# EAGLE board main-manufactured-2016-09-30 (EAGLE 7.6.0)
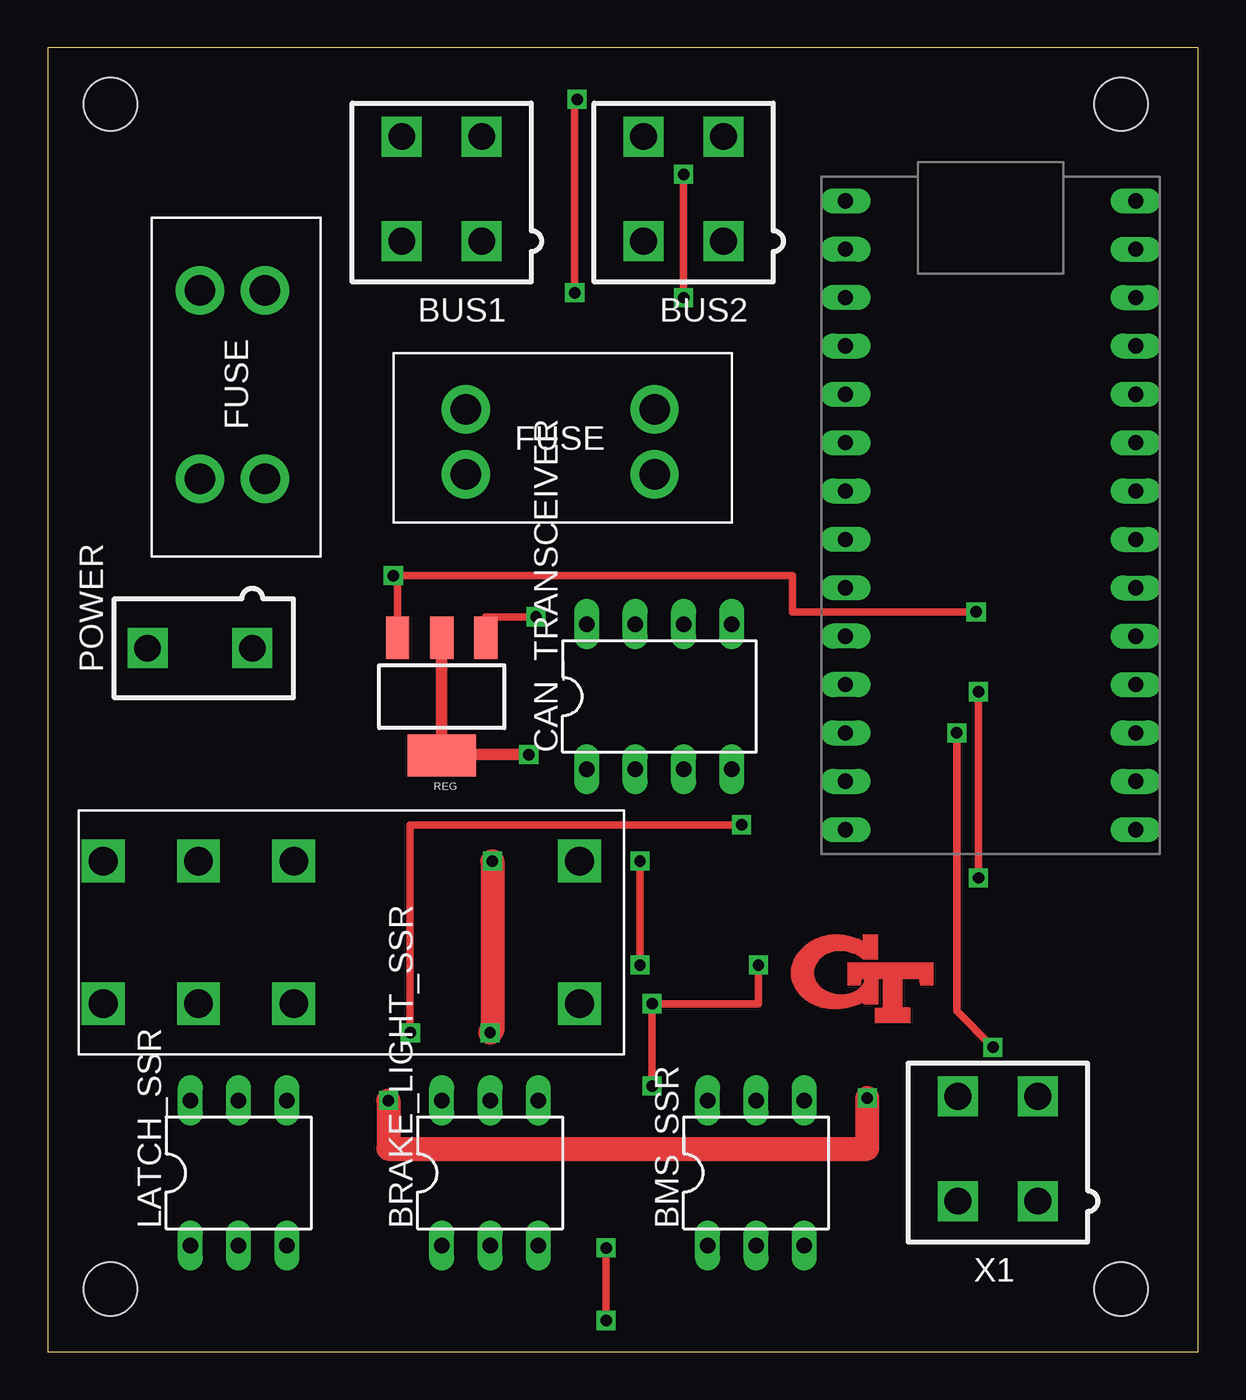
[diagram p0: board, top side]
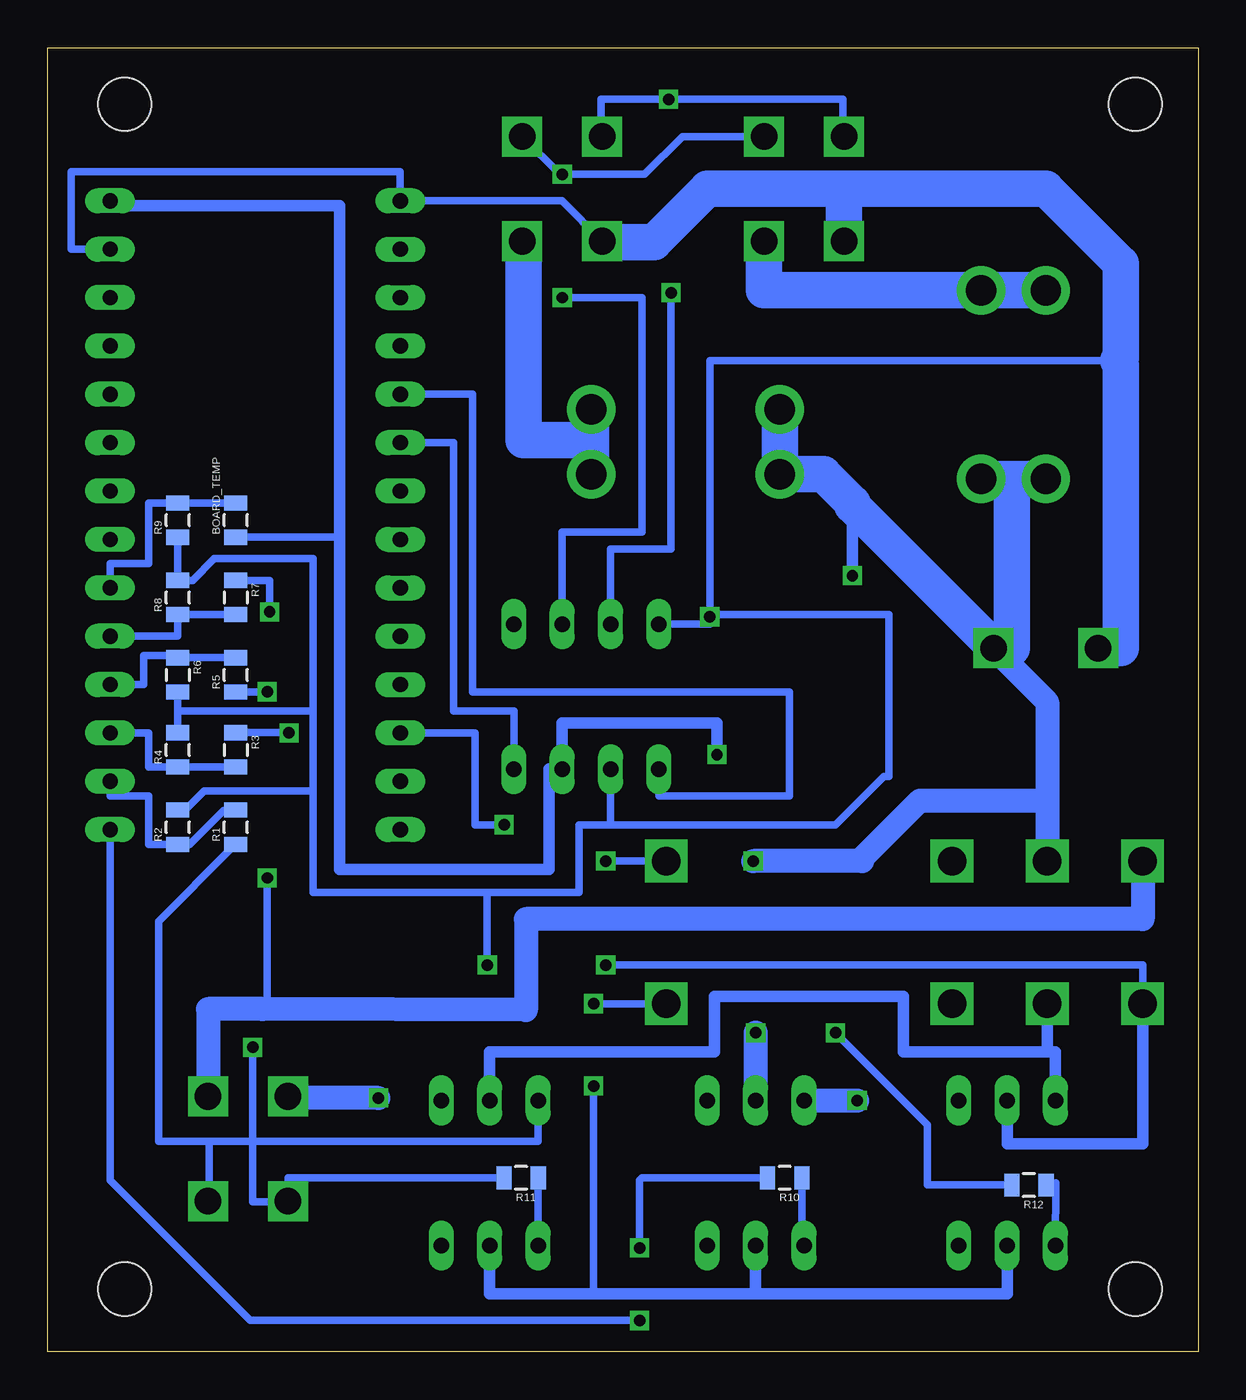
[diagram p1: board, bottom side, seen from below]

Size 60.43 x 68.5 mm. Coordinates in mm from the lower left corner, seen from the top.
Outline: 0,0 60.43,0 60.43,68.5 0,68.5 0,0
Copper layers (1*16): Top 0.035mm / dielectric 1.5mm / Bottom 0.035mm
Design rules "default": minimum track width 10mil, minimum drill 24mil, track to track 8mil, track to pad 8mil, pad to pad 8mil, via to via 8mil, smd to smd 8mil, copper to edge 40mil, drill to drill 8mil, minimum pad ring 10mil, minimum via ring 8mil, stop-mask expansion 4mil, vias tented up to drill 0mil, thermal gap 10mil
Holes 2.8 mm at 3.3,65.53 3.3,3.3 56.39,3.3 56.39,65.53

## Footprints (pad centres in the part's own frame; a part is rotated, then mirrored left to right if it is on the bottom)
DIL06 = drill 0.813 long: 1 -2.54,-3.81; 2 0,-3.81; 3 2.54,-3.81; 4 2.54,3.81; 5 0,3.81; 6 -2.54,3.81
0805 = smd 0.8 x 1.2: 1 -0.9,0; 2 0.9,0
MINIFIT_5566-4 = drill 1.4 square: 1 2.1,-2.75; 2 -2.1,-2.75; 3 2.1,2.75; 4 -2.1,2.75
DIL08 = drill 0.813 long: 1 -3.81,-3.81; 2 -1.27,-3.81; 3 1.27,-3.81; 4 3.81,-3.81; 5 3.81,3.81; 6 1.27,3.81; 7 -1.27,3.81; 8 -3.81,3.81
FUSE_HOLDER = drill 1.6 pad 2.54: L1 0,3.404; L2 0,0; R1 9.906,3.404; R2 9.906,0
DPDT_RELAY_PANASONIC_JW2SN = drill 1.5 square: 2 10.008,0; 3 5.004,0; 4 0,0; 5 0,7.493; 6 5.004,7.493; 7 10.008,7.493; COIL+ 25.019,0; COIL- 25.019,7.493
MINIFIT_5566-2 = drill 1.4 square: 1 0,-2.75; 2 0,2.75
SOT223 = smd 1.219 x 2.235: 1 -2.311,-3.099; 2 0,-3.099; 3 2.311,-3.099 | smd 3.6 x 2.2: 4 0,3.099
TEENSY_3.2_SIMPLE = drill 0.8 long: 3.3V 16.51,29.21; A0 16.51,3.81; A1 16.51,6.35; A2 16.51,8.89; A3 16.51,11.43; A4 16.51,13.97; A5 16.51,16.51; A6 16.51,19.05; A7 16.51,21.59; A8 16.51,24.13; A9 16.51,26.67; AGND 16.51,31.75; D0(RX1) 1.27,31.75; D1(TX1) 1.27,29.21; D2 1.27,26.67; D3(CANTX) 1.27,24.13; D4(CANRX) 1.27,21.59; D5 1.27,19.05; D6 1.27,16.51; D7(RX3) 1.27,13.97; D8(TX3) 1.27,11.43; D9(RX2) 1.27,8.89; D10(TX2) 1.27,6.35; D11 1.27,3.81; D12 1.27,1.27; D13 16.51,1.27; GND 1.27,34.29; VIN 16.51,34.29

## Placement (x,y rotation side)
BMS_SSR  SOLID_STATE_RELAY_VO14642AT  [DIL06]  37.21,9.4 0 top
BOARD_TEMP  THERMISTOR_NCP21  [0805]  50.55,43.69 90 bottom
BRAKE_LIGHT_SSR  SOLID_STATE_RELAY_VO14642AT  [DIL06]  23.24,9.4 0 top
BUS1  MINIFIT_5566-4  [MINIFIT_5566-4]  20.7,61.09 0 top
BUS2  MINIFIT_5566-4  [MINIFIT_5566-4]  33.4,61.09 0 top
CAN_TRANSCEIVER  MCP2551  [DIL08]  32.13,34.42 0 top
FUSE_BUS_1  5A  [FUSE_HOLDER]  8,55.75 270 top
FUSE_BUS_2  5A  [FUSE_HOLDER]  21.97,46.1 0 top
IMD_SHUTDOWN  DPDT_RELAY_PANASONIC_JW2SN-DC9V  [DPDT_RELAY_PANASONIC_JW2SN]  2.92,18.29 0 top
LATCH_SSR  SOLID_STATE_RELAY_VO14642AT  [DIL06]  10.03,9.4 0 top
POWER  MINIFIT_5566-2  [MINIFIT_5566-2]  8,36.96 90 top
R1  [0805]  50.55,27.56 90 bottom
R2  [0805]  53.59,27.56 90 bottom
R3  [0805]  50.55,31.62 270 bottom
R4  [0805]  53.59,31.62 90 bottom
R5  [0805]  50.55,35.56 90 bottom
R6  [0805]  53.59,35.56 270 bottom
R7  [0805]  50.55,39.62 270 bottom
R8  [0805]  53.59,39.62 90 bottom
R9  10k  [0805]  53.59,43.69 90 bottom
R10  10k  [0805]  21.72,9.14 180 bottom
R11  10k  [0805]  35.56,9.14 180 bottom
R12  10k  [0805]  8.89,8.76 180 bottom
REG  5V  [SOT223]  20.7,34.42 180 top
U$3  TEENSY_3.2_SIMPLE  [TEENSY_3.2_SIMPLE]  40.64,26.16 0 top
X1  MINIFIT_5566-4  [MINIFIT_5566-4]  49.91,10.67 0 top

## Library data of the parts
BMS_SSR BOARD_TEMP BRAKE_LIGHT_SSR CAN_TRANSCEIVER FUSE_BUS_1 FUSE_BUS_2 IMD_SHUTDOWN LATCH_SSR R1-R12 REG U$3 = HyTechDevices
BUS1 BUS2 X1 = HyTechDevices; OC_FARNELL: unknown; OC_NEWARK: unknown
POWER = HyTechDevices; OC_FARNELL: 1822072; OC_NEWARK: unknown

## Nets
12VSUPPLY: BRAKE_LIGHT_SSR.5 FUSE_BUS_1.R1 FUSE_BUS_1.R2 FUSE_BUS_2.L1 FUSE_BUS_2.L2 IMD_SHUTDOWN.6 POWER.1 R7.1 REG.3
12VSUPPLY_READ: R7.2 R8.1 U$3.A3
BMS_OK: R3.1 R11.2 X1.2
BMS_OK_READ: R3.2 R4.1 U$3.A1
CANH: BUS1.4 BUS2.4 CAN_TRANSCEIVER.7
CANL: BUS1.3 BUS2.3 CAN_TRANSCEIVER.6
GND: BMS_SSR.2 BRAKE_LIGHT_SSR.2 BUS1.2 BUS2.2 CAN_TRANSCEIVER.2 CAN_TRANSCEIVER.8 IMD_SHUTDOWN.COIL+ LATCH_SSR.2 POWER.2 R2.2 R4.2 R6.2 R8.2 R9.1 REG.1 U$3.AGND U$3.GND
N$1: BOARD_TEMP.1 CAN_TRANSCEIVER.3 REG.2 REG.4 U$3.VIN
N$2: CAN_TRANSCEIVER.4 U$3.D4(CANRX)
N$3: CAN_TRANSCEIVER.1 U$3.D3(CANTX)
N$4: BRAKE_LIGHT_SSR.6 X1.4
N$5: R12.2 U$3.D10(TX2)
N$6: IMD_SHUTDOWN.4 IMD_SHUTDOWN.COIL- LATCH_SSR.5
N$7: BRAKE_LIGHT_SSR.1 R10.1
N$8: BMS_SSR.6 R1.1 X1.1
N$9: BMS_SSR.1 R11.1
N$10: BUS1.1 FUSE_BUS_1.L1 FUSE_BUS_1.L2
N$11: BUS2.1 FUSE_BUS_2.R1 FUSE_BUS_2.R2
N$12: LATCH_SSR.1 R12.1
N$13: R10.2 U$3.D13
N$15: BOARD_TEMP.2 R9.2 U$3.A4
OKHS: BMS_SSR.5 IMD_SHUTDOWN.3 LATCH_SSR.6
OKHS_READ: R1.2 R2.1 U$3.A0
SHUTDOWN_OUT: IMD_SHUTDOWN.5 R5.1 X1.3
SHUTDOWN_OUT_READ: R5.2 R6.1 U$3.A2

## Tracks (layer width: path | path; a pad name or v marks a point on that pad's centre or on a via)
12VSUPPLY  (via drill 0.6)
  Top 0.406: REG.3 18.39,40.77 v18.16,40.77 39.12,40.77 39.12,38.86 v48.77,38.86
  Top 0.61: REG.3 18.16,37.52
  Top 1.27: v23.37,25.78 23.37,16.89 v23.24,16.76
  Bottom 0.406: R7.1 48.77,40.52 v48.77,38.86
  Bottom 0.61: v18.16,40.77 18.16,44.45 18.16,44.58
  Bottom 1.27: POWER.1 7.92,34.13 7.92,28.83 | v23.24,16.76 BRAKE_LIGHT_SSR.5 | v23.37,25.78 17.65,25.78 17.65,25.91 14.61,28.96 8.05,28.96 7.92,28.83 | 7.92,28.83 IMD_SHUTDOWN.6
  Bottom 1.905: FUSE_BUS_2.L1 FUSE_BUS_2.L2 19.68,46.1 18.16,44.58 | FUSE_BUS_1.R2 FUSE_BUS_1.R1 9.78,45.85 9.78,36.96 POWER.1 10.75,37.17 10.88,37.17 18.16,44.45
12VSUPPLY_READ
  Bottom 0.406: R7.2 R8.1 53.59,37.59 U$3.A3
BMS_OK  (via drill 0.6)
  Top 0.406: v47.75,32.51 47.75,17.91 v49.66,16
  Bottom 0.406: R11.2 47.81,9.14 X1.2 47.85,7.87 49.66,7.87 v49.66,16 | R3.1 47.76,32.52 v47.75,32.51
BMS_OK_READ
  Bottom 0.406: R3.2 R4.1 55.12,30.72 55.12,32.51 U$3.A1
CANH  (via drill 0.6)
  Top 0.406: v27.81,65.79 27.69,65.79 v27.69,55.63
  Bottom 0.406: BUS2.4 31.37,63.84 31.37,65.79 v27.81,65.79 18.67,65.79 18.67,63.84 BUS1.4 | v27.69,55.63 27.69,42.16 30.86,42.16 CAN_TRANSCEIVER.7
CANL  (via drill 0.6)
  Top 0.406: v33.4,55.37 v33.4,61.85
  Bottom 0.406: BUS2.3 33.51,61.85 v33.4,61.85 29.08,61.85 27.09,63.84 BUS1.3 | v33.4,55.37 29.21,55.37 29.21,43.05 33.4,43.05 CAN_TRANSCEIVER.6
GND  (via drill 0.6)
  Top 0.406: v25.65,38.61 23.01,38.61 REG.1 | v31.75,13.97 v31.75,18.29 37.34,18.29 v37.34,20.32
  Bottom 0.406: BUS2.2 33.42,60.45 U$3.GND 41.91,61.98 59.18,61.98 59.18,57.91 U$3.AGND | R9.1 R8.2 | R4.2 53.59,33.53 | 53.59,33.53 R6.2 | R8.2 52.82,40.52 51.69,41.66 46.48,41.66 46.48,33.66 | 46.48,33.66 53.47,33.66 53.59,33.53 | R2.2 53.2,28.46 52.2,29.46 46.48,29.46 | 46.48,29.46 46.48,33.66 | 53.59,40.39 R8.2 | 30.86,27.69 19.05,27.69 16.51,30.23 16.26,30.23 16.26,38.73 25.65,38.73 v25.65,38.61 | 30.86,27.69 CAN_TRANSCEIVER.2 | 46.48,29.46 46.48,24.13 37.34,24.13 | 37.34,24.13 32.51,24.13 32.51,27.69 30.86,27.69 | v25.65,38.61 25.65,52.07 4.19,52.07 4.06,51.82 | CAN_TRANSCEIVER.8 25.65,38.23 v25.65,38.61 | IMD_SHUTDOWN.COIL+ v31.75,18.29 | v31.75,13.97 31.75,3.05 | v37.34,20.32 37.34,24.13
  Bottom 0.61: LATCH_SSR.2 10.03,3.05 23.24,3.05 | 23.24,3.05 BRAKE_LIGHT_SSR.2 | BMS_SSR.2 37.21,3.05 31.75,3.05 23.24,3.05
  Bottom 1.905: 18.6,61.09 BUS1.2 | POWER.2 4.06,36.96 4.06,51.82 | 18.6,61.09 25.78,61.09 28.57,58.29 31.26,58.29 BUS2.2 | 18.6,61.09 8,61.09 4.06,57.15 4.06,52.2 4.19,52.07
N$1  (via drill 0.6)
  Top 0.61: REG.2 REG.4 20.7,31.37 v25.27,31.37
  Bottom 0.406: BOARD_TEMP.1 45.09,42.79 45.09,43.18
  Bottom 0.61: v25.27,31.37 25.27,33.02 33.4,33.02 CAN_TRANSCEIVER.3 34.09,30.61 34.09,25.35 45.09,25.35 45.09,43.18 45.09,60.2 57.15,60.2 U$3.VIN
N$2
  Bottom 0.406: CAN_TRANSCEIVER.4 35.94,33.66 39.12,33.66 39.12,47.75 U$3.D4(CANRX)
N$3
  Bottom 0.406: CAN_TRANSCEIVER.1 28.32,29.21 21.46,29.21 21.46,34.67 38.1,34.67 38.1,50.29 U$3.D3(CANTX)
N$4  (via drill 0.6)
  Top 1.27: v17.91,13.21 17.91,10.67 43.05,10.67 v43.05,13.34
  Bottom 1.27: BRAKE_LIGHT_SSR.6 v17.91,13.21 | v43.05,13.34 47.81,13.34 X1.4
N$5  (via drill 0.6)
  Top 0.406: v19.05,16.76 19.05,27.69 v36.45,27.69
  Bottom 0.406: R12.2 14.22,8.76 14.22,11.94 v19.05,16.76 | v36.45,27.69 37.97,27.69 37.97,32.51 U$3.D10(TX2)
N$6  (via drill 0.6)
  Top 0.406: v31.11,25.78 v31.11,20.32
  Bottom 0.406: IMD_SHUTDOWN.COIL- v31.11,25.78 | IMD_SHUTDOWN.4 2.92,20.32 v31.11,20.32
  Bottom 0.61: LATCH_SSR.5 10.03,10.92 2.92,10.92 IMD_SHUTDOWN.4
N$7
  Bottom 0.406: BRAKE_LIGHT_SSR.1 20.82,5.59 R10.1
N$8
  Bottom 0.406: X1.1 51.94,7.92 51.94,11.05 | 51.94,11.05 34.67,11.05 BMS_SSR.6 | R1.1 50.81,26.66 50.81,26.41 54.61,22.61 54.61,11.05 51.94,11.05
N$9
  Bottom 0.406: BMS_SSR.1 R11.1
N$10
  Bottom 1.905: FUSE_BUS_1.L2 FUSE_BUS_1.L1 22.8,55.75 BUS1.1
N$11
  Bottom 1.905: FUSE_BUS_2.R2 FUSE_BUS_2.R1 31.88,47.88 35.43,47.88 35.43,58.34 BUS2.1
N$12
  Bottom 0.406: LATCH_SSR.1 7.48,8.89 R12.1
N$13  (via drill 0.6)
  Top 0.406: v29.34,5.46 v29.34,1.65
  Bottom 0.406: R10.2 29.21,9.14 29.34,9.02 v29.34,5.46 | v29.34,1.65 49.78,1.65 57.15,9.02 U$3.D13
N$15
  Bottom 0.406: BOARD_TEMP.2 R9.2 55.12,44.59 55.12,41.4 57.15,41.4 U$3.A4
OKHS
  Bottom 0.61: BMS_SSR.5 37.21,15.75 25.4,15.75 25.4,18.67 15.49,18.67 15.49,15.75 7.92,15.75 | 7.92,15.75 IMD_SHUTDOWN.3 | LATCH_SSR.6 7.49,15.75 7.92,15.75
OKHS_READ
  Bottom 0.406: R1.2 50.56,28.45 51.18,28.45 52.97,26.66 R2.1 55.12,26.66 55.12,29.21 57.15,29.21 U$3.A0
SHUTDOWN_OUT  (via drill 0.6)
  Top 0.406: v48.9,34.67 v48.9,24.89
  Bottom 0.406: R5.1 v48.91,34.66 v48.9,34.67 | v48.9,24.89 48.9,17.78 49.15,18.01
  Bottom 1.27: IMD_SHUTDOWN.5 2.92,22.73 35.31,22.73 35.31,17.96 49.15,18.01 52.01,18.01 X1.3
SHUTDOWN_OUT_READ
  Bottom 0.406: R5.2 R6.1 53.59,36.58 55.37,36.58 55.37,35.05 U$3.A2
(copper drawn outside any net)
  shapes: Top area x375